# Altium PCB PowerSwitching.PcbDoc
Units mil, origin at the board's own origin, x right, y up, seen from the top; angles counter-clockwise.
Board outline 302 x 637 mil, 2 copper layers (Top Layer, Bottom Layer); 11 components, 7 nets, 30 pads, 3 vias.
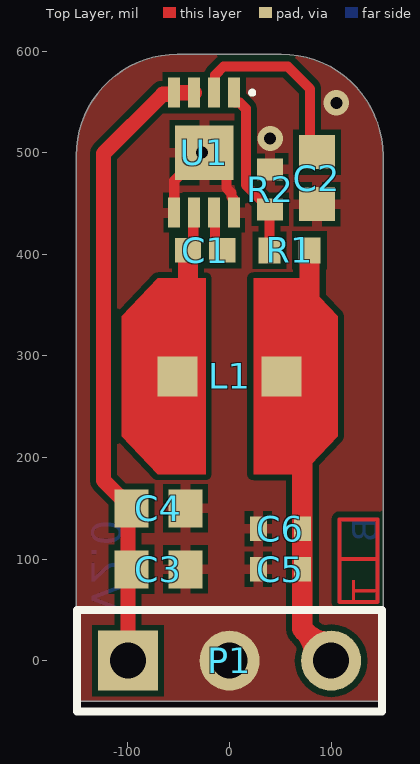
[diagram p0: Top Layer view]
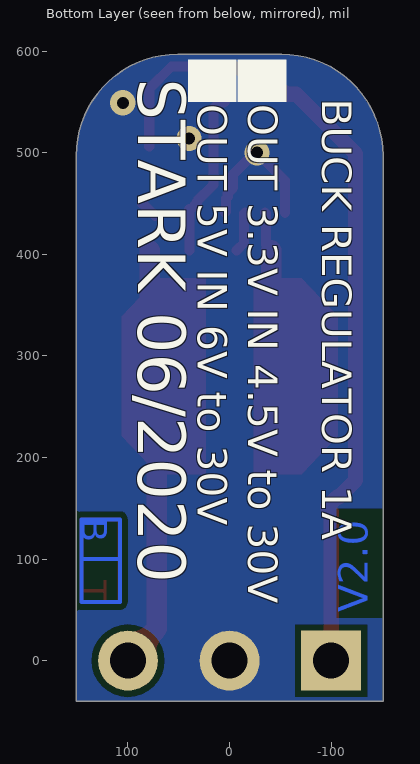
[diagram p1: Bottom Layer view, seen from below]

## Layer stack, top to bottom
Top Solder: solder mask 0.4, Solder Resist, Dk 3.5
Top Layer: signal copper 1.4
Dielectric 1: dielectric 12.6, FR-4, Dk 4.8
Bottom Layer: signal copper 1.4
Bottom Solder: solder mask 0.4, Solder Resist, Dk 3.5

## Board outline
-151,-40 151,-40 151,497 ccw(c51,497) 51,597 -51,597 ccw(c-51,497) -151,497

## Design rules (kind name [scope] priority, off if disabled: settings)
AssemblyTestPointUsage [All] p1: valid=2
BoardOutlineClearance [All] p1: gap=10 ignorepadtopadclearanceinfootprint=FALSE except(0: Arc-SplitContinuation Track-SplitContinuation SMDPad-SplitContinuation THPad-SplitContinuation Via-SplitContinuation Fill-SplitContinuation Poly-SplitContinuation Region-SplitContinuation Text-SplitContinuation; 0.5: Poly-OutlineEdge)
Clearance [All] p1: gap=6 ignorepadtopadclearanceinfootprint=FALSE except(0: Arc-Hole Track-Hole SMDPad-Hole THPad-Hole Via-Hole Fill-Hole Poly-Hole Region-Hole Text-Hole)
FabricationTestPointUsage [All] p1: valid=2 allowmultiple=FALSE
MinimumSolderMaskSliver [All] p1: minsoldermaskwidth=3.5
PolygonConnect [All] p1: thpad.connectstyle=Direct thpad.reliefconductorwidth=10 thpad.reliefentries=4 thpad.polygonreliefangle="90 Angle" thpad.airgapwidth=10 smdpad.connectstyle=Relief smdpad.reliefconductorwidth=10 smdpad.reliefentries=4 smdpad.polygonreliefangle="90 Angle" smdpad.airgapwidth=5 via.connectstyle=Direct via.reliefconductorwidth=10 via.reliefentries=4 via.polygonreliefangle="90 Angle" via.airgapwidth=5
RoutingVias [All] p1: holewidth=28 width=50 viastyle="Through Hole" minholewidth=11.81 minwidth=20 maxholewidth=28 maxwidth=50
SilkToSilkClearance [All] p1: silktosilkclearance=1
SilkToSolderMaskClearance [IsPad] p1: minsilkscreentomaskgap=5 clearancetoexposedcopper=TRUE
SolderMaskExpansion SolderMaskExpansion_Via [IsVia] p1: expansion=4 istentingtop=TRUE
SolderMaskExpansion [All] p2: expansion=2 istentingtop=FALSE
Width Width_Trackd [IsTrack] p1: maxlimit=100 minlimit=1 preferedwidth=10
Width [All] p2: maxlimit=20 minlimit=10 preferedwidth=10 minimp=50.000000 maximp=50.000000 favimp=50.000000
25 further rules are at their usual default settings.

## Classes and differential pairs
net class Power: GND Vin Vout

## Components (designator, comment, footprint, x,y, rotation, side; value= is the part's Value field where it differs from the comment)
C1 "0.1uF" CAPC1005X55X30NL05T10 -24,404 r180 top
C2 "1uF" CAPC1608X90X35LL15T15 86,475 r90 top
C3 "10µF" CAPC1608X90X35NL10T15 -70,90 r0 top
C4 "10µF" CAPC1608X90X35NL10T15 -70,150 r0 top
C5 "10µF" CAPC1005X70X10NL05 50,90 r0 top
C6 "10µF" CAPC1005X70X10NL05 50,130 r0 top
L1 "22uH" "Coil CMS TDK VLCF" 0,280 r90 top
P1 "Header 3" HDR1X3 -100,0 r0 top
R1 "52.3k" RESC0402(1005)_N 59,404 r0 top
R2 "10k" RESC0402(1005)_N 40,464 r270 top
U1 "MCP16311" TDFN-MN8 -25,500 r270 top

## Footprints (in the part's own frame and the unit in brackets; to place one, negate y for a bottom-side part, rotate by r counter-clockwise, add the part's x,y. Pads: shape width x height; smd on the part's side, far side on the other; paste and mask are expansions set on the pad)
CAPC1005X55X30NL05T10 [mm] "Chip Capacitor, 2-Leads, Body 1.00x0.50mm, IPC Medium Density"
  rect 0.66x0.62 smd: 1(-0.43,0) 2(0.43,0)
  body extent -0.53,-0.28 0.53,0.27, height 0.55
CAPC1005X70X10NL05 [mm] "Chip Capacitor, 2-Leads, Body 1.05x0.55mm, IPC Medium Density"
  rect 0.42x0.62 smd: 1(-0.55,0) 2(0.55,0)
  body extent -0.53,-0.28 0.53,0.28, height 0.7
CAPC1608X90X35LL15T15 [mm] "Chip Capacitor, 2-Leads, Body 1.60x0.81mm, IPC High Density"
  rect 0.85x0.9 smd: 1(-0.65,0) 2(0.65,0)
  body extent -0.88,-0.48 0.87,0.48, height 0.9
CAPC1608X90X35NL10T15 [mm] "Chip Capacitor, 2-Leads, Body 1.60x0.80mm, IPC Medium Density"
  rect 0.85x0.95 smd: 1(-0.675,0) 2(0.675,0)
  body extent -0.85,-0.45 0.85,0.45, height 0.9
"Coil CMS TDK VLCF" [mm]
  rect 1x1 smd: 1(0,1.3) 2(0,-1.3)
  Top Layer region: -2.45,0.6 -2.45,1.8 -1.5,2.7 1.5,2.7 2.45,1.8 2.45,0.6
  Top Layer region: 2.45,-0.6 2.45,-1.8 1.5,-2.7 -1.5,-2.7 -2.45,-1.8 -2.45,-0.6
  body extent -2.5,-2.5 2.5,2.5, height 2.91
HDR1X3 [mm] "Connector; Header; 3 Position"
  rect 1.5x1.5 hole 0.9: 1(0,0)
  round 1.5 hole 0.9: 2(2.54,0) 3(5.08,0)
  silkscreen extent -1.27,-1.27 6.35,1.27
RESC0402(1005)_N [mm] "Chip Resistor, Body 1.0x0.5mm, IPC Medium Density"
  rect 0.55x0.65 smd: 1(-0.5,0) 2(0.5,0)
  body extent -0.52,-0.27 0.53,0.28, height 0.4
TDFN-MN8 [mm] "SON, 8-Leads, Body 2x3mm, Pitch 0.5mm, Microchip Recommended"
  rect 0.75x0.3 smd: 1(-1.5,0.75) 2(-1.5,0.25) 3(-1.5,-0.25) 4(-1.5,-0.75) 5(1.5,-0.75) 6(1.5,-0.25) 7(1.5,0.25) 8(1.5,0.75)
  rect 1.36x1.46 smd: 9(0,0)
  silkscreen extent -1.55,1.15 -1.45,1.25, body extent -1.5,-1.02 1.5,0.98, height 0.39

## Part data
C1: library part CMP-2008-03087-1, Mfg=Kemet, MfgPn=C0402C104K9RACTU
C2: library part CMP-2006-02241-1, Mfg=Kemet, MfgPn=C0603C105K9PACTU
C3 C4: library part CMP-2006-02792-1, Mfg=Murata, MfgPn=GRM188R6YA106MA73D
C5 C6: library part CMP-2000-05993-1, "Chip Capacitor, 10 uF, +/- 20%, -55 to 85 degC, 0402 (1005 Metric), RoHS, Tape and Reel", Manufacturer=TDK, Operating Temperature=-55°C~85°C, Package / Case=0402(1005Metric), Package Description="2-Pin Surface Mount Device, Body 1.00 x 0.50 mm", Package Reference=0402, Ratings=-, Standard Package=1, Temperature Coefficient=X5R, Tolerance=±20%, Voltage - Rated=10V, Applications=GeneralPurpose, Capacitance=10µF, Category=Capacitors, Datasheet URL=https://media.digikey.com/pdf/Data%20Sheets/Samsung%20PDFs/CL05A106MP8NUB8_Spec.pdf, Datasheet Version=03/2015, Family=CeramicCapacitors, Features=-, Height - Seated (Max)=-, Lead Spacing=-, Lead Style=-, Manufacturer URL=http://www.tdk.com/, Mfg=Samsung, MfgPn=CL05A106MP8NUB8, Mounting Technology=SurfaceMount, Mounting Type=SurfaceMount,MLCC, Online Catalog=CSeries,GeneralPurpose, Packaging=CutTape(CT), Product Training Modules=CSeriesGeneralApplicationsSEAT,CCV,andTVCLDesignToolsGuidetoReplacinganElectrolyticCapacitorwithanMLCC, RoHS Information=RoHSCertificate-MLCC, Series=C, Size / Dimension="0.039\"Lx0.020\"W(1.00mmx0.50mm)", Thickness (Max)="0.020\"(0.50mm)"
L1: library part "Ind 22uH 1.1A CMS", "Inductance bobinée CMS, 22 μH, 1.1A max , dimensions 5.3 x 5 x 2mm, Blindé, série VLCF", Supplier Part Number 1=445-3200-1-ND, ComponentLink1Description=Datasheet, ComponentLink1URL=https://docs.rs-online.com/d546/0900766b814e91e4.pdf, Mfg=TDK, MfgPn=VLCF5020T-220MR58, Supplier 1=Digi-Key, Supplier 2=Digi-Key, Supplier 3=Farnell, Supplier 4=RSComponents, Supplier 5=RSComponents, Supplier 6=Mouser, Supplier Part Number 2=445-3200-6-ND, Supplier Part Number 3=1670097, Supplier Part Number 4=6142841, Supplier Part Number 5=6142841P, Supplier Part Number 6=810-VLCF5020T220MR58
P1: "Header, 3-Pin", LatestRevisionDate=17-Jul-2002, LatestRevisionNote="Re-released for DXP Platform.", Publisher="Altium Limited"
R1: library part CMP-1011-00705-1, "52K3 0.063W 1% 0402 (1005 Metric)  SMD", Case-EIA=0402, Case-Metric=1005, Power="0.063 W", Tolerance="1 %", Technology=SMT
R2: library part CMP-1011-00623-1, "10K 0.063W 1% 0402 (1005 Metric)  SMD", Case-EIA=0402, Case-Metric=1005, Power="0.063 W", Tolerance="1 %", Technology=SMT
U1: "30V Input, 1A Output, High-Efficiency,Integrated Synchronous Switch Step-Down Regulator", Supplier Part Number 1=MCP16311T-E/MNYCT-ND, Supplier Part Number 10=8243088P, Supplier Part Number 11=8243088, Supplier Part Number 12=579-MCP16311-E/MS, Supplier Part Number 13=MCP16311T-E/MSCT-ND, Supplier Part Number 14=MCP16311T-E/MSDKR-ND, Supplier Part Number 15=2857601, Supplier Part Number 16=579-MCP16311T-E/MS, ComponentLink1Description=Datasheet, ComponentLink1URL=http://ww1.microchip.com/downloads/en/DeviceDoc/MCP16311-Family-Data-Sheet-DS20005255C.pdf, Mfg=Microchip, MfgPn=MCP16311, Supplier 1=Digi-Key, Supplier 2=Digi-Key, Supplier 3=RSComponents, Supplier 4=RSComponents, Supplier 5=Farnell, Supplier 6=Mouser, Supplier 7=Digi-Key, Supplier 8=Farnell, Supplier 9=Avnet, Supplier 10=RSComponents, Supplier 11=RSComponents, Supplier 12=Mouser, Supplier 13=Digi-Key, Supplier 14=Digi-Key, Supplier 15=Farnell, Supplier 16=Mouser, Supplier Part Number 2=MCP16311T-E/MNYDKR-ND, Supplier Part Number 3=8417526, Supplier Part Number 4=8417526P, Supplier Part Number 5=2857600, Supplier Part Number 6=579-MCP16311T-E/MNY, Supplier Part Number 7=MCP16311-E/MS-ND, Supplier Part Number 8=2414134, Supplier Part Number 9=MCP16311-E/MS

## Via types
v1: diameter 25, hole 11.81, Top Layer to Bottom Layer, tented both sides, 3 vias

## Nets (pads, with @x,y where several pads share a name; then routed paths per layer and width w, separated by ;. In a path a pad name is that pad's centre, name@x,y a point inside that pad or via, vN(x,y) a via of type N, cw(c..) or ccw(c..) an arc to the next point about the centre after c; other vN are vias at no path point)
GND: C2.1 C3.2 C4.2 C5.1 C6.1 P1.2 R2.1 U1.5 U1.8 U1.9 | length 161.4
  Top Layer w10: U1.5 -54.53,472.44 v1(-26.97,500) U1.9 -24.9,500 -3.13,478.23 -3.13,465.14 1.75,460.27 1.75,456.57 3.62,454.69 3.62,441.85 U1.8 ; C2.1@73.28,437.68 85.02,449.41 C2.1
  other v1: 40,514 105,549
NetC1_1: C1.1 U1.7 | length 40.3
  Top Layer w10: U1.7 -14.25,440.04 -14.25,411.18 C1.1
NetC1_2: C1.2 L1.1 U1.6 | length 167.7
  Top Layer w10: C1.2 -35.75,409.18 -35.75,440.04 U1.6
  Top Layer w20: L1.1 -40.93,290.25 C1.2
NetC2_2: C2.2 U1.2 | length 180.2
  Top Layer w10: U1.2 -14.25,559.96 -14.25,576.5 -5.93,584.82 57.18,584.82 79.15,562.85 C2.2@79.15,506.46
NetR1_1: R1.1 R2.2 U1.1 | length 173.9
  Top Layer w10: U1.1 4.53,550.2 5.43,549.29 10.14,549.29 16,543.43 16,468.32 32.2,452.11 32.2,450.14 38.03,444.31 R2.2 39.32,443.63 R1.1
Vin: C3.1 C4.1 P1.1 U1.3 U1.4 | length 627.1
  Top Layer w15: P1.1 -100,90 -100,146.57 C4.1 -96.57,151.97 -105.81,161.2 -107.78,161.2 -124,177.43 -124,499.29 -65.83,557.46 -56.12,557.46 U1.4 U1.3
Vout: C5.2 C6.2 L1.2 P1.3 R1.2 | length 444.9
  Top Layer w20: R1.2 78.69,307.5 L1.2 71.65,259.53 C6.2 C5.2 71.65,31.24 100,2.9 P1.3 P1.3@106.57,6.57
copper on no net: | length 549.8
  Top Layer w3.94: 108.15,100 145.78,100 ; 108.15,100 108.15,58 145.78,58 145.78,100 ; 108.15,100 108.15,139 145.78,139 145.78,100
  Bottom Layer w3.94: 108,100 108,139 145.63,139 145.63,100 ; 108,100 108,58 145.63,58 145.63,100 ; 108,100 145.63,100

## Polygon pours and split planes (outlines as drawn)
GND on Top Layer "GND_L01_P000" (solid, remove dead copper, pour order 0): -151,-40 162,-40 162,541 ccw(c62,541) 62,641 -51,641 ccw(c-51,541) -151,541
GND on Bottom Layer "GND_L02_P001" (solid, remove dead copper, pour order 1): -151,-40 162,-40 162,541 ccw(c62,541) 62,641 -51,641 ccw(c-51,541) -151,541
no net on Top Solder "NONET_L01_P-001" (solid): 108,58 108,139 146,139 146,58
no net on Bottom Solder "NONET_L01_P-001" (solid): 108,58 108,139 146,139 146,58

## Other copper
Top Layer:
  text "T" at 145.78,58 h25 r90
Bottom Layer:
  text "B" at 145.63,139.99 h25 r90
  text "V2.0" at -145.66,47.81 h50 r270

## Silkscreen, mask and mechanical layers (free items; w line width, h text height)
Bottom Overlay:
  rectangle: -7,550 41,592
  rectangle: -56,550 -8,592
  text "STARK 06/2020" at 105,573 h80 r90
  text "BUCK REGULATOR 1A" at -81.54,553 h50 r90
  text "OUT 3.3V IN 4.5V to 30V / OUT 5V IN 6V to 30V" at 41.36,547.9 h50 r90
Board:
  the board outline again, w3.94

## Dimensions
151,-40 to 51,597 on Dimensions
-151,-40 to 151,-40 on Dimensions